# EAGLE board output120b (EAGLE 6.2), part 1 of 2
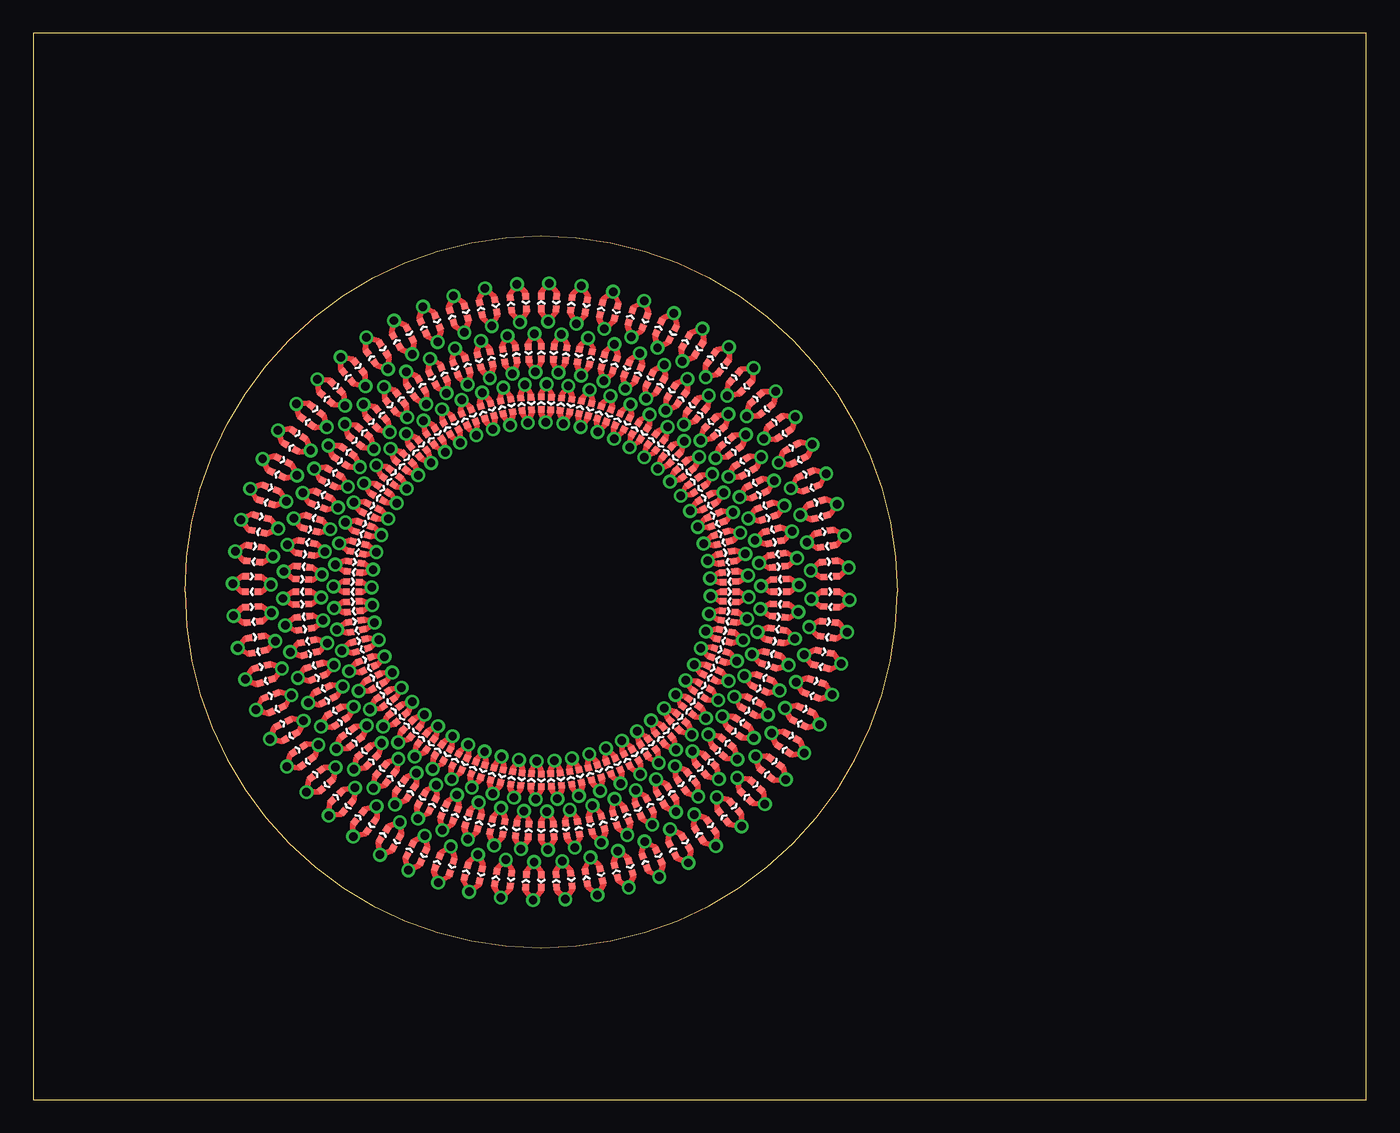
[diagram p0: board, top side]
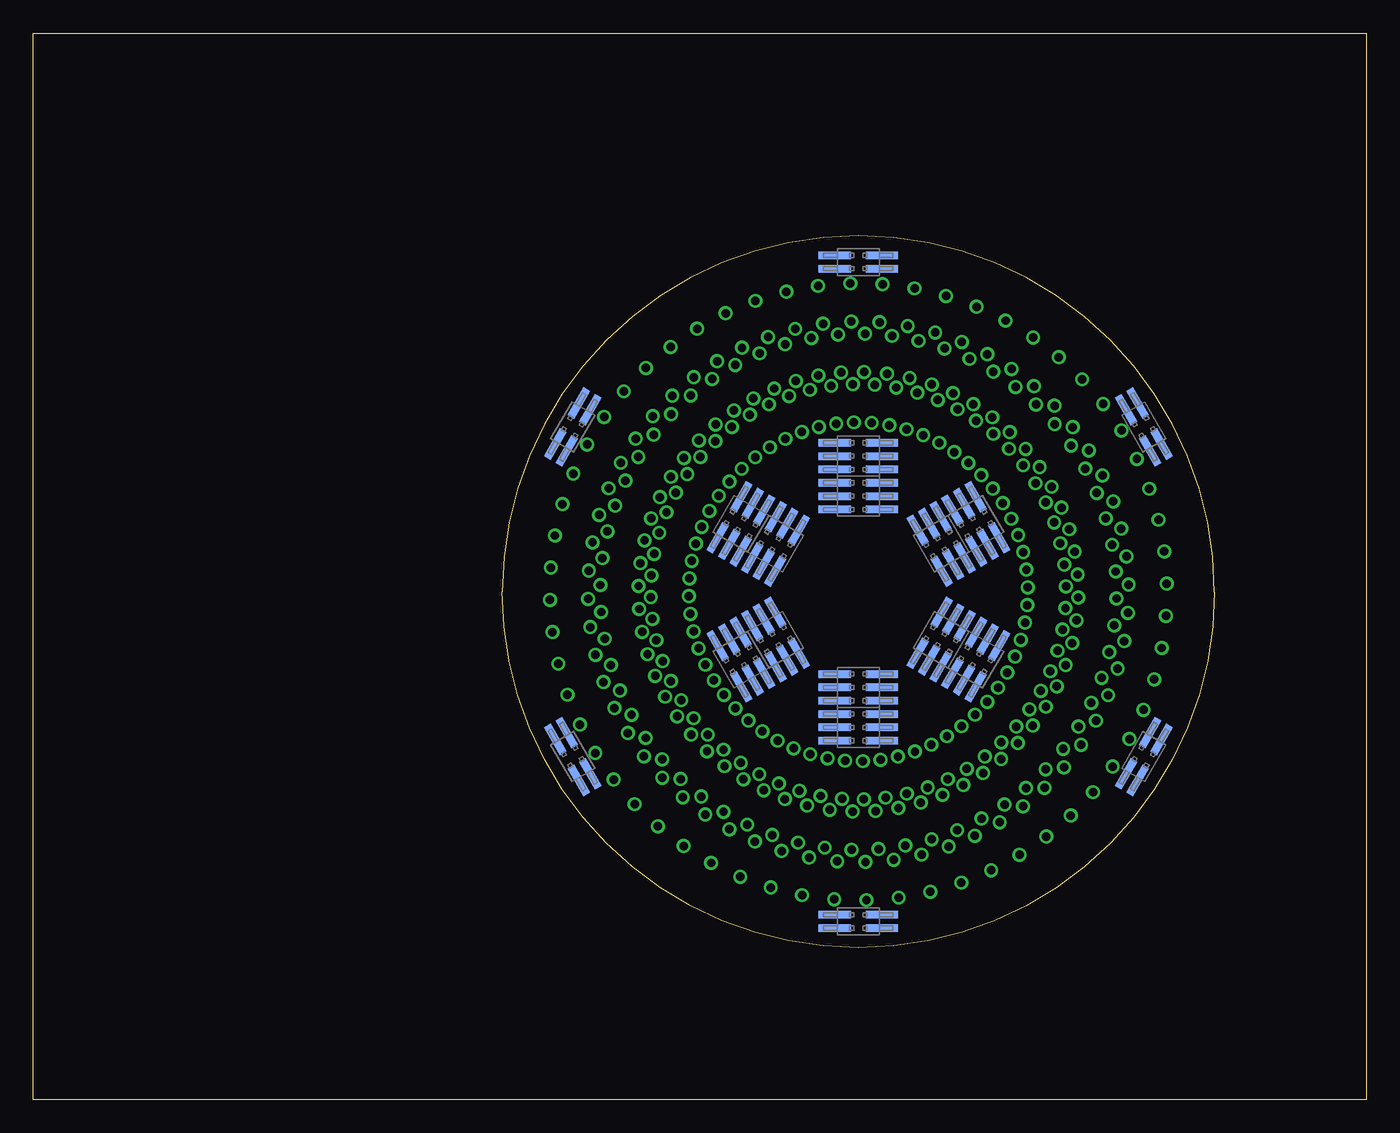
[diagram p1: board, bottom side, seen from below]

Size 100 x 80 mm. Coordinates in mm from the lower left corner, seen from the top.
Outline: 0,0 100,0 100,80 0,80 0,0
Outline: 11.38,38.1 arc180 64.81,38.1 arc180 11.38,38.1
Copper layers (1*16): Top 0.035mm / dielectric 1.5mm / Bottom 0.035mm
Design rules: minimum track width 10mil, minimum drill 24mil, track to track 8mil, track to pad 8mil, pad to pad 8mil, via to via 8mil, smd to smd 8mil, copper to edge 40mil, drill to drill 8mil, minimum pad ring 10mil, minimum via ring 8mil, stop-mask expansion 4mil, vias tented up to drill 0mil, thermal gap 10mil

## Footprints (pad centres in the part's own frame; a part is rotated, then mirrored left to right if it is on the bottom)
3X2_1MM_SMD = smd 2.413 x 0.559: P1 -1.778,1; P2 -1.778,0; P3 -1.778,-1; P4 1.778,-1; P5 1.778,0; P6 1.778,1
2X2_1MM_SMD = smd 2.413 x 0.559: P1 -1.778,0.5; P2 -1.778,-0.5; P3 1.778,-0.5; P4 1.778,0.5
LED-0402 = smd 0.5 x 0.5: A 0,-0.469; C 0,0.469

## Placement (x,y rotation side)
H1  2X3  [3X2_1MM_SMD]  38.1,48.27 0 bottom
H2  2X3  [3X2_1MM_SMD]  46.91,43.19 60 bottom
H3  2X3  [3X2_1MM_SMD]  46.91,33.01 120 bottom
H4  2X3  [3X2_1MM_SMD]  38.1,27.93 180 bottom
H5  2X3  [3X2_1MM_SMD]  29.29,33.01 240 bottom
H6  2X3  [3X2_1MM_SMD]  29.29,43.19 300 bottom
H7  2X3  [3X2_1MM_SMD]  38.1,45.27 0 bottom
H8  2X3  [3X2_1MM_SMD]  44.31,41.69 60 bottom
H9  2X3  [3X2_1MM_SMD]  44.31,34.51 120 bottom
H10  2X3  [3X2_1MM_SMD]  38.1,30.93 180 bottom
H11  2X3  [3X2_1MM_SMD]  31.89,34.51 240 bottom
H12  2X3  [3X2_1MM_SMD]  31.89,41.69 300 bottom
H13  2X2  [2X2_1MM_SMD]  38.1,62.84 180 bottom
H14  2X2  [2X2_1MM_SMD]  59.52,50.47 240 bottom
H15  2X2  [2X2_1MM_SMD]  59.52,25.73 300 bottom
H16  2X2  [2X2_1MM_SMD]  38.1,13.36 0 bottom
H17  2X2  [2X2_1MM_SMD]  16.68,25.73 60 bottom
H18  2X2  [2X2_1MM_SMD]  16.68,50.47 120 bottom
LED1  RED  [LED-0402]  38.1,52.25 0 top
LED2  RED  [LED-0402]  38.84,52.23 177 top
LED3  RED  [LED-0402]  39.58,52.17 354 top
LED4  RED  [LED-0402]  40.31,52.07 171 top
LED5  RED  [LED-0402]  41.04,51.94 348 top
LED6  RED  [LED-0402]  41.76,51.77 165 top
LED7  RED  [LED-0402]  42.47,51.55 342 top
LED8  RED  [LED-0402]  43.17,51.31 159 top
LED9  RED  [LED-0402]  43.85,51.02 336 top
LED10  RED  [LED-0402]  44.52,50.71 153 top
LED11  RED  [LED-0402]  45.17,50.35 330 top
LED12  RED  [LED-0402]  45.81,49.96 147 top
LED13  RED  [LED-0402]  46.42,49.55 324 top
LED14  RED  [LED-0402]  47,49.09 141 top
LED15  RED  [LED-0402]  47.57,48.61 318 top
LED16  RED  [LED-0402]  48.1,48.1 135 top
LED17  RED  [LED-0402]  48.61,47.57 312 top
LED18  RED  [LED-0402]  49.09,47 129 top
LED19  RED  [LED-0402]  49.55,46.42 306 top
LED20  RED  [LED-0402]  49.96,45.81 123 top
LED21  RED  [LED-0402]  50.35,45.17 300 top
LED22  RED  [LED-0402]  50.71,44.52 117 top
LED23  RED  [LED-0402]  51.02,43.85 294 top
LED24  RED  [LED-0402]  51.31,43.17 111 top
LED25  RED  [LED-0402]  51.55,42.47 288 top
LED26  RED  [LED-0402]  51.77,41.76 105 top
LED27  RED  [LED-0402]  51.94,41.04 282 top
LED28  RED  [LED-0402]  52.07,40.31 99 top
LED29  RED  [LED-0402]  52.17,39.58 276 top
LED30  RED  [LED-0402]  52.23,38.84 93 top
LED31  RED  [LED-0402]  52.25,38.1 270 top
LED32  RED  [LED-0402]  52.23,37.36 87 top
LED33  RED  [LED-0402]  52.17,36.62 264 top
LED34  RED  [LED-0402]  52.07,35.89 81 top
LED35  RED  [LED-0402]  51.94,35.16 258 top
LED36  RED  [LED-0402]  51.77,34.44 75 top
LED37  RED  [LED-0402]  51.55,33.73 252 top
LED38  RED  [LED-0402]  51.31,33.03 69 top
LED39  RED  [LED-0402]  51.02,32.35 246 top
LED40  RED  [LED-0402]  50.71,31.68 63 top
LED41  RED  [LED-0402]  50.35,31.03 240 top
LED42  RED  [LED-0402]  49.96,30.39 57 top
LED43  RED  [LED-0402]  49.55,29.78 234 top
LED44  RED  [LED-0402]  49.09,29.2 51 top
LED45  RED  [LED-0402]  48.61,28.63 228 top
LED46  RED  [LED-0402]  48.1,28.1 45 top
LED47  RED  [LED-0402]  47.57,27.59 222 top
LED48  RED  [LED-0402]  47,27.11 39 top
LED49  RED  [LED-0402]  46.42,26.65 216 top
LED50  RED  [LED-0402]  45.81,26.24 33 top
LED51  RED  [LED-0402]  45.17,25.85 210 top
LED52  RED  [LED-0402]  44.52,25.49 27 top
LED53  RED  [LED-0402]  43.85,25.18 204 top
LED54  RED  [LED-0402]  43.17,24.89 21 top
LED55  RED  [LED-0402]  42.47,24.65 198 top
LED56  RED  [LED-0402]  41.76,24.43 15 top
LED57  RED  [LED-0402]  41.04,24.26 192 top
LED58  RED  [LED-0402]  40.31,24.13 9 top
LED59  RED  [LED-0402]  39.58,24.03 186 top
LED60  RED  [LED-0402]  38.84,23.97 3 top
LED61  RED  [LED-0402]  38.1,23.95 180 top
LED62  RED  [LED-0402]  37.36,23.97 357 top
LED63  RED  [LED-0402]  36.62,24.03 174 top
LED64  RED  [LED-0402]  35.89,24.13 351 top
LED65  RED  [LED-0402]  35.16,24.26 168 top
LED66  RED  [LED-0402]  34.44,24.43 345 top
LED67  RED  [LED-0402]  33.73,24.65 162 top
LED68  RED  [LED-0402]  33.03,24.89 339 top
LED69  RED  [LED-0402]  32.35,25.18 156 top
LED70  RED  [LED-0402]  31.68,25.49 333 top
LED71  RED  [LED-0402]  31.03,25.85 150 top
LED72  RED  [LED-0402]  30.39,26.24 327 top
LED73  RED  [LED-0402]  29.78,26.65 144 top
LED74  RED  [LED-0402]  29.2,27.11 321 top
LED75  RED  [LED-0402]  28.63,27.59 138 top
LED76  RED  [LED-0402]  28.1,28.1 315 top
LED77  RED  [LED-0402]  27.59,28.63 132 top
LED78  RED  [LED-0402]  27.11,29.2 309 top
LED79  RED  [LED-0402]  26.65,29.78 126 top
LED80  RED  [LED-0402]  26.24,30.39 303 top
LED81  RED  [LED-0402]  25.85,31.03 120 top
LED82  RED  [LED-0402]  25.49,31.68 297 top
LED83  RED  [LED-0402]  25.18,32.35 114 top
LED84  RED  [LED-0402]  24.89,33.03 291 top
LED85  RED  [LED-0402]  24.65,33.73 108 top
LED86  RED  [LED-0402]  24.43,34.44 285 top
LED87  RED  [LED-0402]  24.26,35.16 102 top
LED88  RED  [LED-0402]  24.13,35.89 279 top
LED89  RED  [LED-0402]  24.03,36.62 96 top
LED90  RED  [LED-0402]  23.97,37.36 273 top
LED91  RED  [LED-0402]  23.95,38.1 90 top
LED92  RED  [LED-0402]  23.97,38.84 267 top
LED93  RED  [LED-0402]  24.03,39.58 84 top
LED94  RED  [LED-0402]  24.13,40.31 261 top
LED95  RED  [LED-0402]  24.26,41.04 78 top
LED96  RED  [LED-0402]  24.43,41.76 255 top
LED97  RED  [LED-0402]  24.65,42.47 72 top
LED98  RED  [LED-0402]  24.89,43.17 249 top
LED99  RED  [LED-0402]  25.18,43.85 66 top
LED100  RED  [LED-0402]  25.49,44.52 243 top
LED101  RED  [LED-0402]  25.85,45.17 60 top
LED102  RED  [LED-0402]  26.24,45.81 237 top
LED103  RED  [LED-0402]  26.65,46.42 54 top
LED104  RED  [LED-0402]  27.11,47 231 top
LED105  RED  [LED-0402]  27.59,47.57 48 top
LED106  RED  [LED-0402]  28.1,48.1 225 top
LED107  RED  [LED-0402]  28.63,48.61 42 top
LED108  RED  [LED-0402]  29.2,49.09 219 top
LED109  RED  [LED-0402]  29.78,49.55 36 top
LED110  RED  [LED-0402]  30.39,49.96 213 top
LED111  RED  [LED-0402]  31.03,50.35 30 top
LED112  RED  [LED-0402]  31.68,50.71 207 top
LED113  RED  [LED-0402]  32.35,51.02 24 top
LED114  RED  [LED-0402]  33.03,51.31 201 top
LED115  RED  [LED-0402]  33.73,51.55 18 top
LED116  RED  [LED-0402]  34.44,51.77 195 top
LED117  RED  [LED-0402]  35.16,51.94 12 top
LED118  RED  [LED-0402]  35.89,52.07 189 top
LED119  RED  [LED-0402]  36.62,52.17 6 top
LED120  RED  [LED-0402]  37.36,52.23 183 top
LED121  GREEN  [LED-0402]  38.1,56.03 0 top
LED122  GREEN  [LED-0402]  39.04,56.01 177 top
LED123  GREEN  [LED-0402]  39.97,55.93 354 top
LED124  GREEN  [LED-0402]  40.91,55.81 171 top
LED125  GREEN  [LED-0402]  41.83,55.64 348 top
LED126  GREEN  [LED-0402]  42.74,55.42 165 top
LED127  GREEN  [LED-0402]  43.64,55.15 342 top
LED128  GREEN  [LED-0402]  44.53,54.84 159 top
LED129  GREEN  [LED-0402]  45.39,54.48 336 top
LED130  GREEN  [LED-0402]  46.24,54.08 153 top
LED131  GREEN  [LED-0402]  47.07,53.63 330 top
LED132  GREEN  [LED-0402]  47.87,53.14 147 top
LED133  GREEN  [LED-0402]  48.64,52.61 324 top
LED134  GREEN  [LED-0402]  49.38,52.04 141 top
LED135  GREEN  [LED-0402]  50.1,51.43 318 top
LED136  GREEN  [LED-0402]  50.78,50.78 135 top
LED137  GREEN  [LED-0402]  51.43,50.1 312 top
LED138  GREEN  [LED-0402]  52.04,49.38 129 top
LED139  GREEN  [LED-0402]  52.61,48.64 306 top
LED140  GREEN  [LED-0402]  53.14,47.87 123 top
LED141  GREEN  [LED-0402]  53.63,47.07 300 top
LED142  GREEN  [LED-0402]  54.08,46.24 117 top
LED143  GREEN  [LED-0402]  54.48,45.39 294 top
LED144  GREEN  [LED-0402]  54.84,44.53 111 top
LED145  GREEN  [LED-0402]  55.15,43.64 288 top
LED146  GREEN  [LED-0402]  55.42,42.74 105 top
LED147  GREEN  [LED-0402]  55.64,41.83 282 top
LED148  GREEN  [LED-0402]  55.81,40.91 99 top
LED149  GREEN  [LED-0402]  55.93,39.97 276 top
LED150  GREEN  [LED-0402]  56.01,39.04 93 top
LED151  GREEN  [LED-0402]  56.03,38.1 270 top
LED152  GREEN  [LED-0402]  56.01,37.16 87 top
LED153  GREEN  [LED-0402]  55.93,36.23 264 top
LED154  GREEN  [LED-0402]  55.81,35.29 81 top
LED155  GREEN  [LED-0402]  55.64,34.37 258 top
LED156  GREEN  [LED-0402]  55.42,33.46 75 top
LED157  GREEN  [LED-0402]  55.15,32.56 252 top
LED158  GREEN  [LED-0402]  54.84,31.67 69 top
LED159  GREEN  [LED-0402]  54.48,30.81 246 top
LED160  GREEN  [LED-0402]  54.08,29.96 63 top
LED161  GREEN  [LED-0402]  53.63,29.13 240 top
LED162  GREEN  [LED-0402]  53.14,28.33 57 top
LED163  GREEN  [LED-0402]  52.61,27.56 234 top
LED164  GREEN  [LED-0402]  52.04,26.82 51 top
LED165  GREEN  [LED-0402]  51.43,26.1 228 top
LED166  GREEN  [LED-0402]  50.78,25.42 45 top
LED167  GREEN  [LED-0402]  50.1,24.77 222 top
LED168  GREEN  [LED-0402]  49.38,24.16 39 top
LED169  GREEN  [LED-0402]  48.64,23.59 216 top
LED170  GREEN  [LED-0402]  47.87,23.06 33 top
LED171  GREEN  [LED-0402]  47.07,22.57 210 top
LED172  GREEN  [LED-0402]  46.24,22.12 27 top
LED173  GREEN  [LED-0402]  45.39,21.72 204 top
LED174  GREEN  [LED-0402]  44.53,21.36 21 top
LED175  GREEN  [LED-0402]  43.64,21.05 198 top
LED176  GREEN  [LED-0402]  42.74,20.78 15 top
LED177  GREEN  [LED-0402]  41.83,20.56 192 top
LED178  GREEN  [LED-0402]  40.91,20.39 9 top
LED179  GREEN  [LED-0402]  39.97,20.27 186 top
LED180  GREEN  [LED-0402]  39.04,20.19 3 top
LED181  GREEN  [LED-0402]  38.1,20.17 180 top
LED182  GREEN  [LED-0402]  37.16,20.19 357 top
LED183  GREEN  [LED-0402]  36.23,20.27 174 top
LED184  GREEN  [LED-0402]  35.29,20.39 351 top
LED185  GREEN  [LED-0402]  34.37,20.56 168 top
LED186  GREEN  [LED-0402]  33.46,20.78 345 top
LED187  GREEN  [LED-0402]  32.56,21.05 162 top
LED188  GREEN  [LED-0402]  31.67,21.36 339 top
LED189  GREEN  [LED-0402]  30.81,21.72 156 top
LED190  GREEN  [LED-0402]  29.96,22.12 333 top
LED191  GREEN  [LED-0402]  29.13,22.57 150 top
LED192  GREEN  [LED-0402]  28.33,23.06 327 top
LED193  GREEN  [LED-0402]  27.56,23.59 144 top
LED194  GREEN  [LED-0402]  26.82,24.16 321 top
LED195  GREEN  [LED-0402]  26.1,24.77 138 top
LED196  GREEN  [LED-0402]  25.42,25.42 315 top
LED197  GREEN  [LED-0402]  24.77,26.1 132 top
LED198  GREEN  [LED-0402]  24.16,26.82 309 top
LED199  GREEN  [LED-0402]  23.59,27.56 126 top
LED200  GREEN  [LED-0402]  23.06,28.33 303 top
LED201  GREEN  [LED-0402]  22.57,29.13 120 top
LED202  GREEN  [LED-0402]  22.12,29.96 297 top
LED203  GREEN  [LED-0402]  21.72,30.81 114 top
LED204  GREEN  [LED-0402]  21.36,31.67 291 top
LED205  GREEN  [LED-0402]  21.05,32.56 108 top
LED206  GREEN  [LED-0402]  20.78,33.46 285 top
LED207  GREEN  [LED-0402]  20.56,34.37 102 top
LED208  GREEN  [LED-0402]  20.39,35.29 279 top
LED209  GREEN  [LED-0402]  20.27,36.23 96 top
LED210  GREEN  [LED-0402]  20.19,37.16 273 top
LED211  GREEN  [LED-0402]  20.17,38.1 90 top
LED212  GREEN  [LED-0402]  20.19,39.04 267 top
LED213  GREEN  [LED-0402]  20.27,39.97 84 top
LED214  GREEN  [LED-0402]  20.39,40.91 261 top
LED215  GREEN  [LED-0402]  20.56,41.83 78 top
LED216  GREEN  [LED-0402]  20.78,42.74 255 top
LED217  GREEN  [LED-0402]  21.05,43.64 72 top
LED218  GREEN  [LED-0402]  21.36,44.53 249 top
LED219  GREEN  [LED-0402]  21.72,45.39 66 top
LED220  GREEN  [LED-0402]  22.12,46.24 243 top
LED221  GREEN  [LED-0402]  22.57,47.07 60 top
LED222  GREEN  [LED-0402]  23.06,47.87 237 top
LED223  GREEN  [LED-0402]  23.59,48.64 54 top
LED224  GREEN  [LED-0402]  24.16,49.38 231 top
LED225  GREEN  [LED-0402]  24.77,50.1 48 top
LED226  GREEN  [LED-0402]  25.42,50.78 225 top
LED227  GREEN  [LED-0402]  26.1,51.43 42 top
LED228  GREEN  [LED-0402]  26.82,52.04 219 top
LED229  GREEN  [LED-0402]  27.56,52.61 36 top
LED230  GREEN  [LED-0402]  28.33,53.14 213 top
LED231  GREEN  [LED-0402]  29.13,53.63 30 top
LED232  GREEN  [LED-0402]  29.96,54.08 207 top
LED233  GREEN  [LED-0402]  30.81,54.48 24 top
LED234  GREEN  [LED-0402]  31.67,54.84 201 top
LED235  GREEN  [LED-0402]  32.56,55.15 18 top
LED236  GREEN  [LED-0402]  33.46,55.42 195 top
LED237  GREEN  [LED-0402]  34.37,55.64 12 top
LED238  GREEN  [LED-0402]  35.29,55.81 189 top
LED239  GREEN  [LED-0402]  36.23,55.93 6 top
LED240  GREEN  [LED-0402]  37.16,56.01 183 top
LED241  BLUE  [LED-0402]  38.1,59.82 0 top
LED242  BLUE  [LED-0402]  39.24,59.79 177 top
LED243  BLUE  [LED-0402]  40.37,59.7 354 top
LED244  BLUE  [LED-0402]  41.5,59.55 171 top
LED245  BLUE  [LED-0402]  42.62,59.34 348 top
LED246  BLUE  [LED-0402]  43.72,59.08 165 top
LED247  BLUE  [LED-0402]  44.81,58.75 342 top
LED248  BLUE  [LED-0402]  45.88,58.37 159 top
LED249  BLUE  [LED-0402]  46.93,57.94 336 top
LED250  BLUE  [LED-0402]  47.96,57.45 153 top
LED251  BLUE  [LED-0402]  48.96,56.91 330 top
LED252  BLUE  [LED-0402]  49.93,56.31 147 top
LED253  BLUE  [LED-0402]  50.86,55.67 324 top
LED254  BLUE  [LED-0402]  51.77,54.98 141 top
LED255  BLUE  [LED-0402]  52.63,54.24 318 top
LED256  BLUE  [LED-0402]  53.46,53.46 135 top
LED257  BLUE  [LED-0402]  54.24,52.63 312 top
LED258  BLUE  [LED-0402]  54.98,51.77 129 top
LED259  BLUE  [LED-0402]  55.67,50.86 306 top
LED260  BLUE  [LED-0402]  56.31,49.93 123 top
LED261  BLUE  [LED-0402]  56.91,48.96 300 top
LED262  BLUE  [LED-0402]  57.45,47.96 117 top
LED263  BLUE  [LED-0402]  57.94,46.93 294 top
LED264  BLUE  [LED-0402]  58.37,45.88 111 top
LED265  BLUE  [LED-0402]  58.75,44.81 288 top
LED266  BLUE  [LED-0402]  59.08,43.72 105 top
LED267  BLUE  [LED-0402]  59.34,42.62 282 top
LED268  BLUE  [LED-0402]  59.55,41.5 99 top
LED269  BLUE  [LED-0402]  59.7,40.37 276 top
LED270  BLUE  [LED-0402]  59.79,39.24 93 top
LED271  BLUE  [LED-0402]  59.82,38.1 270 top
LED272  BLUE  [LED-0402]  59.79,36.96 87 top
LED273  BLUE  [LED-0402]  59.7,35.83 264 top
LED274  BLUE  [LED-0402]  59.55,34.7 81 top
LED275  BLUE  [LED-0402]  59.34,33.58 258 top
LED276  BLUE  [LED-0402]  59.08,32.48 75 top
LED277  BLUE  [LED-0402]  58.75,31.39 252 top
LED278  BLUE  [LED-0402]  58.37,30.32 69 top
LED279  BLUE  [LED-0402]  57.94,29.27 246 top
LED280  BLUE  [LED-0402]  57.45,28.24 63 top
LED281  BLUE  [LED-0402]  56.91,27.24 240 top
LED282  BLUE  [LED-0402]  56.31,26.27 57 top
LED283  BLUE  [LED-0402]  55.67,25.34 234 top
LED284  BLUE  [LED-0402]  54.98,24.43 51 top
LED285  BLUE  [LED-0402]  54.24,23.57 228 top
LED286  BLUE  [LED-0402]  53.46,22.74 45 top
LED287  BLUE  [LED-0402]  52.63,21.96 222 top
LED288  BLUE  [LED-0402]  51.77,21.22 39 top
LED289  BLUE  [LED-0402]  50.86,20.53 216 top
LED290  BLUE  [LED-0402]  49.93,19.89 33 top
LED291  BLUE  [LED-0402]  48.96,19.29 210 top
LED292  BLUE  [LED-0402]  47.96,18.75 27 top
LED293  BLUE  [LED-0402]  46.93,18.26 204 top
LED294  BLUE  [LED-0402]  45.88,17.83 21 top
LED295  BLUE  [LED-0402]  44.81,17.45 198 top
LED296  BLUE  [LED-0402]  43.72,17.12 15 top
LED297  BLUE  [LED-0402]  42.62,16.86 192 top
LED298  BLUE  [LED-0402]  41.5,16.65 9 top
LED299  BLUE  [LED-0402]  40.37,16.5 186 top
LED300  BLUE  [LED-0402]  39.24,16.41 3 top
LED301  BLUE  [LED-0402]  38.1,16.38 180 top
LED302  BLUE  [LED-0402]  36.96,16.41 357 top
LED303  BLUE  [LED-0402]  35.83,16.5 174 top
LED304  BLUE  [LED-0402]  34.7,16.65 351 top
LED305  BLUE  [LED-0402]  33.58,16.86 168 top
LED306  BLUE  [LED-0402]  32.48,17.12 345 top
LED307  BLUE  [LED-0402]  31.39,17.45 162 top
LED308  BLUE  [LED-0402]  30.32,17.83 339 top
LED309  BLUE  [LED-0402]  29.27,18.26 156 top
LED310  BLUE  [LED-0402]  28.24,18.75 333 top
LED311  BLUE  [LED-0402]  27.24,19.29 150 top
LED312  BLUE  [LED-0402]  26.27,19.89 327 top
LED313  BLUE  [LED-0402]  25.34,20.53 144 top
LED314  BLUE  [LED-0402]  24.43,21.22 321 top
LED315  BLUE  [LED-0402]  23.57,21.96 138 top
LED316  BLUE  [LED-0402]  22.74,22.74 315 top
LED317  BLUE  [LED-0402]  21.96,23.57 132 top
LED318  BLUE  [LED-0402]  21.22,24.43 309 top
LED319  BLUE  [LED-0402]  20.53,25.34 126 top
LED320  BLUE  [LED-0402]  19.89,26.27 303 top
LED321  BLUE  [LED-0402]  19.29,27.24 120 top
LED322  BLUE  [LED-0402]  18.75,28.24 297 top
LED323  BLUE  [LED-0402]  18.26,29.27 114 top
LED324  BLUE  [LED-0402]  17.83,30.32 291 top
LED325  BLUE  [LED-0402]  17.45,31.39 108 top
LED326  BLUE  [LED-0402]  17.12,32.48 285 top
LED327  BLUE  [LED-0402]  16.86,33.58 102 top
LED328  BLUE  [LED-0402]  16.65,34.7 279 top
LED329  BLUE  [LED-0402]  16.5,35.83 96 top
LED330  BLUE  [LED-0402]  16.41,36.96 273 top
LED331  BLUE  [LED-0402]  16.38,38.1 90 top
LED332  BLUE  [LED-0402]  16.41,39.24 267 top
LED333  BLUE  [LED-0402]  16.5,40.37 84 top
LED334  BLUE  [LED-0402]  16.65,41.5 261 top
LED335  BLUE  [LED-0402]  16.86,42.62 78 top
LED336  BLUE  [LED-0402]  17.12,43.72 255 top
LED337  BLUE  [LED-0402]  17.45,44.81 72 top
LED338  BLUE  [LED-0402]  17.83,45.88 249 top
LED339  BLUE  [LED-0402]  18.26,46.93 66 top
LED340  BLUE  [LED-0402]  18.75,47.96 243 top
LED341  BLUE  [LED-0402]  19.29,48.96 60 top
LED342  BLUE  [LED-0402]  19.89,49.93 237 top
LED343  BLUE  [LED-0402]  20.53,50.86 54 top
LED344  BLUE  [LED-0402]  21.22,51.77 231 top
LED345  BLUE  [LED-0402]  21.96,52.63 48 top
LED346  BLUE  [LED-0402]  22.74,53.46 225 top
LED347  BLUE  [LED-0402]  23.57,54.24 42 top
LED348  BLUE  [LED-0402]  24.43,54.98 219 top
LED349  BLUE  [LED-0402]  25.34,55.67 36 top
LED350  BLUE  [LED-0402]  26.27,56.31 213 top
LED351  BLUE  [LED-0402]  27.24,56.91 30 top
LED352  BLUE  [LED-0402]  28.24,57.45 207 top
LED353  BLUE  [LED-0402]  29.27,57.94 24 top
LED354  BLUE  [LED-0402]  30.32,58.37 201 top
LED355  BLUE  [LED-0402]  31.39,58.75 18 top
LED356  BLUE  [LED-0402]  32.48,59.08 195 top
LED357  BLUE  [LED-0402]  33.58,59.34 12 top
LED358  BLUE  [LED-0402]  34.7,59.55 189 top
LED359  BLUE  [LED-0402]  35.83,59.7 6 top
LED360  BLUE  [LED-0402]  36.96,59.79 183 top

## Library data of the parts
H1-H18 LED1-LED360 = Customs

## Nets
N$1: LED1.A LED2.C
N$2: LED3.A LED4.C
N$3: LED5.A LED6.C
N$4: LED7.A LED8.C
N$5: LED9.A LED10.C
N$6: LED11.A LED12.C
N$7: LED13.A LED14.C
N$8: LED15.A LED16.C
N$9: LED17.A LED18.C
N$10: LED19.A LED20.C
N$11: LED21.A LED22.C
N$12: LED23.A LED24.C
N$13: LED25.A LED26.C
N$14: LED27.A LED28.C
N$15: LED29.A LED30.C
N$16: LED31.A LED32.C
N$17: LED33.A LED34.C
N$18: LED35.A LED36.C
N$19: LED37.A LED38.C
N$20: LED39.A LED40.C
N$21: LED41.A LED42.C
N$22: LED43.A LED44.C
N$23: LED45.A LED46.C
N$24: LED47.A LED48.C
N$25: LED49.A LED50.C
N$26: LED51.A LED52.C
N$27: LED53.A LED54.C
N$28: LED55.A LED56.C
N$29: LED57.A LED58.C
N$30: LED59.A LED60.C
N$31: LED61.A LED62.C
N$32: LED63.A LED64.C
N$33: LED65.A LED66.C
N$34: LED67.A LED68.C
N$35: LED69.A LED70.C
N$36: LED71.A LED72.C
N$37: LED73.A LED74.C
N$38: LED75.A LED76.C
N$39: LED77.A LED78.C
N$40: LED79.A LED80.C
N$41: LED81.A LED82.C
N$42: LED83.A LED84.C
N$43: LED85.A LED86.C
N$44: LED87.A LED88.C
N$45: LED89.A LED90.C
N$46: LED91.A LED92.C
N$47: LED93.A LED94.C
N$48: LED95.A LED96.C
N$49: LED97.A LED98.C
N$50: LED99.A LED100.C
N$51: LED101.A LED102.C
N$52: LED103.A LED104.C
N$53: LED105.A LED106.C
N$54: LED107.A LED108.C
N$55: LED109.A LED110.C
N$56: LED111.A LED112.C
N$57: LED113.A LED114.C
N$58: LED115.A LED116.C
N$59: LED117.A LED118.C
N$60: LED119.A LED120.C
N$61: LED122.C LED123.A
N$62: LED124.C LED125.A
N$63: LED126.C LED127.A
N$64: LED128.C LED129.A
N$65: LED130.C LED131.A
N$66: LED132.C LED133.A
N$67: LED134.C LED135.A
N$68: LED136.C LED137.A
N$69: LED138.C LED139.A
N$70: LED140.C LED141.A
N$71: LED142.C LED143.A
N$72: LED144.C LED145.A
N$73: LED146.C LED147.A
N$74: LED148.C LED149.A
N$75: LED150.C LED151.A
N$76: LED152.C LED153.A
N$77: LED154.C LED155.A
N$78: LED156.C LED157.A
N$79: LED158.C LED159.A
N$80: LED160.C LED161.A
N$81: LED162.C LED163.A
N$82: LED164.C LED165.A
N$83: LED166.C LED167.A
N$84: LED168.C LED169.A
N$85: LED170.C LED171.A
N$86: LED172.C LED173.A
N$87: LED174.C LED175.A
N$88: LED176.C LED177.A
N$89: LED178.C LED179.A
N$90: LED180.C LED181.A
N$91: LED182.C LED183.A
N$92: LED184.C LED185.A
N$93: LED186.C LED187.A
N$94: LED188.C LED189.A
N$95: LED190.C LED191.A
N$96: LED192.C LED193.A
N$97: LED194.C LED195.A
N$98: LED196.C LED197.A
N$99: LED198.C LED199.A
N$100: LED200.C LED201.A
N$101: LED202.C LED203.A
N$102: LED204.C LED205.A
N$103: LED206.C LED207.A
N$104: LED208.C LED209.A
N$105: LED210.C LED211.A
N$106: LED212.C LED213.A
N$107: LED214.C LED215.A
N$108: LED216.C LED217.A
N$109: LED218.C LED219.A
N$110: LED220.C LED221.A
N$111: LED222.C LED223.A
N$112: LED224.C LED225.A
N$113: LED226.C LED227.A
N$114: LED228.C LED229.A
N$115: LED230.C LED231.A
N$116: LED232.C LED233.A
N$117: LED234.C LED235.A
N$118: LED236.C LED237.A
N$119: LED238.C LED239.A
N$120: LED121.A LED240.C
N$121: LED241.A LED242.C
N$122: LED243.A LED244.C
N$123: LED245.A LED246.C
N$124: LED247.A LED248.C
N$125: LED249.A LED250.C
N$126: LED251.A LED252.C
N$127: LED253.A LED254.C
N$128: LED255.A LED256.C
N$129: LED257.A LED258.C
N$130: LED259.A LED260.C
N$131: LED261.A LED262.C
N$132: LED263.A LED264.C
N$133: LED265.A LED266.C
N$134: LED267.A LED268.C
N$135: LED269.A LED270.C
N$136: LED271.A LED272.C
N$137: LED273.A LED274.C
N$138: LED275.A LED276.C
N$139: LED277.A LED278.C
N$140: LED279.A LED280.C
N$141: LED281.A LED282.C
N$142: LED283.A LED284.C
N$143: LED285.A LED286.C
N$144: LED287.A LED288.C
N$145: LED289.A LED290.C
N$146: LED291.A LED292.C
N$147: LED293.A LED294.C
N$148: LED295.A LED296.C
N$149: LED297.A LED298.C
N$150: LED299.A LED300.C
N$151: LED301.A LED302.C
N$152: LED303.A LED304.C
N$153: LED305.A LED306.C
N$154: LED307.A LED308.C
N$155: LED309.A LED310.C
N$156: LED311.A LED312.C
N$157: LED313.A LED314.C
N$158: LED315.A LED316.C
N$159: LED317.A LED318.C
N$160: LED319.A LED320.C
N$161: LED321.A LED322.C
N$162: LED323.A LED324.C
N$163: LED325.A LED326.C
N$164: LED327.A LED328.C
N$165: LED329.A LED330.C
N$166: LED331.A LED332.C
N$167: LED333.A LED334.C
N$168: LED335.A LED336.C
N$169: LED337.A LED338.C
N$170: LED339.A LED340.C
N$171: LED341.A LED342.C
N$172: LED343.A LED344.C
N$173: LED345.A LED346.C
N$174: LED347.A LED348.C
N$175: LED349.A LED350.C
N$176: LED351.A LED352.C
N$177: LED353.A LED354.C
N$178: LED355.A LED356.C
N$179: LED357.A LED358.C
N$180: LED359.A LED360.C
N$181: LED1.C LED2.A
N$182: LED3.C LED4.A
N$183: LED5.C LED6.A
N$184: LED7.C LED8.A
N$185: LED9.C LED10.A
N$186: LED11.C LED12.A
N$187: LED13.C LED14.A
N$188: LED15.C LED16.A
N$189: LED17.C LED18.A
N$190: LED19.C LED20.A
N$191: LED21.C LED22.A
N$192: LED23.C LED24.A
N$193: LED25.C LED26.A
N$194: LED27.C LED28.A
N$195: LED29.C LED30.A
N$196: LED31.C LED32.A
N$197: LED33.C LED34.A
N$198: LED35.C LED36.A
N$199: LED37.C LED38.A
N$200: LED39.C LED40.A
N$201: LED41.C LED42.A
N$202: LED43.C LED44.A
N$203: LED45.C LED46.A
N$204: LED47.C LED48.A
N$205: LED49.C LED50.A
N$206: LED51.C LED52.A
N$207: LED53.C LED54.A
N$208: LED55.C LED56.A
N$209: LED57.C LED58.A
N$210: LED59.C LED60.A
N$211: LED61.C LED62.A
N$212: LED63.C LED64.A
N$213: LED65.C LED66.A
N$214: LED67.C LED68.A
N$215: LED69.C LED70.A
N$216: LED71.C LED72.A
N$217: LED73.C LED74.A
N$218: LED75.C LED76.A
N$219: LED77.C LED78.A
N$220: LED79.C LED80.A
N$221: LED81.C LED82.A
N$222: LED83.C LED84.A
N$223: LED85.C LED86.A
N$224: LED87.C LED88.A
N$225: LED89.C LED90.A
N$226: LED91.C LED92.A
N$227: LED93.C LED94.A
N$228: LED95.C LED96.A
N$229: LED97.C LED98.A
N$230: LED99.C LED100.A
N$231: LED101.C LED102.A
N$232: LED103.C LED104.A
N$233: LED105.C LED106.A
N$234: LED107.C LED108.A
N$235: LED109.C LED110.A
N$236: LED111.C LED112.A
N$237: LED113.C LED114.A
N$238: LED115.C LED116.A
N$239: LED117.C LED118.A
N$240: LED119.C LED120.A
N$241: LED122.A LED123.C
N$242: LED124.A LED125.C
N$243: LED126.A LED127.C
N$244: LED128.A LED129.C
N$245: LED130.A LED131.C
N$246: LED132.A LED133.C
N$247: LED134.A LED135.C
N$248: LED136.A LED137.C
N$249: LED138.A LED139.C
N$250: LED140.A LED141.C
N$251: LED142.A LED143.C
N$252: LED144.A LED145.C
N$253: LED146.A LED147.C
N$254: LED148.A LED149.C
N$255: LED150.A LED151.C
N$256: LED152.A LED153.C
N$257: LED154.A LED155.C
N$258: LED156.A LED157.C
N$259: LED158.A LED159.C
N$260: LED160.A LED161.C
N$261: LED162.A LED163.C
N$262: LED164.A LED165.C
N$263: LED166.A LED167.C
N$264: LED168.A LED169.C
N$265: LED170.A LED171.C
N$266: LED172.A LED173.C
N$267: LED174.A LED175.C
N$268: LED176.A LED177.C
N$269: LED178.A LED179.C
N$270: LED180.A LED181.C
N$271: LED182.A LED183.C
N$272: LED184.A LED185.C
N$273: LED186.A LED187.C
N$274: LED188.A LED189.C
N$275: LED190.A LED191.C
N$276: LED192.A LED193.C
N$277: LED194.A LED195.C
N$278: LED196.A LED197.C
N$279: LED198.A LED199.C
N$280: LED200.A LED201.C
N$281: LED202.A LED203.C
N$282: LED204.A LED205.C
N$283: LED206.A LED207.C
N$284: LED208.A LED209.C
N$285: LED210.A LED211.C
N$286: LED212.A LED213.C
N$287: LED214.A LED215.C
N$288: LED216.A LED217.C
N$289: LED218.A LED219.C
N$290: LED220.A LED221.C
N$291: LED222.A LED223.C
N$292: LED224.A LED225.C
N$293: LED226.A LED227.C
N$294: LED228.A LED229.C
N$295: LED230.A LED231.C
N$296: LED232.A LED233.C
N$297: LED234.A LED235.C
N$298: LED236.A LED237.C
N$299: LED238.A LED239.C
N$300: LED121.C LED240.A
N$301: LED241.C LED242.A
N$302: LED243.C LED244.A
N$303: LED245.C LED246.A
N$304: LED247.C LED248.A
N$305: LED249.C LED250.A
N$306: LED251.C LED252.A
N$307: LED253.C LED254.A
N$308: LED255.C LED256.A
N$309: LED257.C LED258.A
N$310: LED259.C LED260.A
N$311: LED261.C LED262.A
N$312: LED263.C LED264.A
N$313: LED265.C LED266.A
N$314: LED267.C LED268.A
N$315: LED269.C LED270.A
N$316: LED271.C LED272.A
N$317: LED273.C LED274.A
N$318: LED275.C LED276.A
N$319: LED277.C LED278.A
N$320: LED279.C LED280.A
N$321: LED281.C LED282.A
N$322: LED283.C LED284.A
N$323: LED285.C LED286.A
N$324: LED287.C LED288.A
N$325: LED289.C LED290.A
N$326: LED291.C LED292.A
N$327: LED293.C LED294.A
N$328: LED295.C LED296.A
N$329: LED297.C LED298.A
N$330: LED299.C LED300.A
N$331: LED301.C LED302.A
N$332: LED303.C LED304.A
N$333: LED305.C LED306.A
N$334: LED307.C LED308.A
N$335: LED309.C LED310.A
N$336: LED311.C LED312.A
N$337: LED313.C LED314.A
N$338: LED315.C LED316.A
N$339: LED317.C LED318.A
N$340: LED319.C LED320.A
N$341: LED321.C LED322.A
N$342: LED323.C LED324.A
N$343: LED325.C LED326.A
N$344: LED327.C LED328.A
N$345: LED329.C LED330.A
N$346: LED331.C LED332.A
N$347: LED333.C LED334.A
N$348: LED335.C LED336.A
N$349: LED337.C LED338.A
N$350: LED339.C LED340.A
N$351: LED341.C LED342.A
N$352: LED343.C LED344.A
N$353: LED345.C LED346.A
N$354: LED347.C LED348.A
N$355: LED349.C LED350.A
N$356: LED351.C LED352.A
N$357: LED353.C LED354.A
N$358: LED355.C LED356.A
N$359: LED357.C LED358.A
N$360: LED359.C LED360.A